# Altium PCB 最小系统.PcbDoc
Units mil, origin at the board's own origin, x right, y up, seen from the top; angles counter-clockwise.
Board outline 1775 x 1565 mil, 4 copper layers (Top Layer, GND02, PO, Bottom Layer), stack 23.756 mil thick; 50 components, 97 nets, 312 pads, 89 vias.
Unrouted connection lines stored in the file: 1.
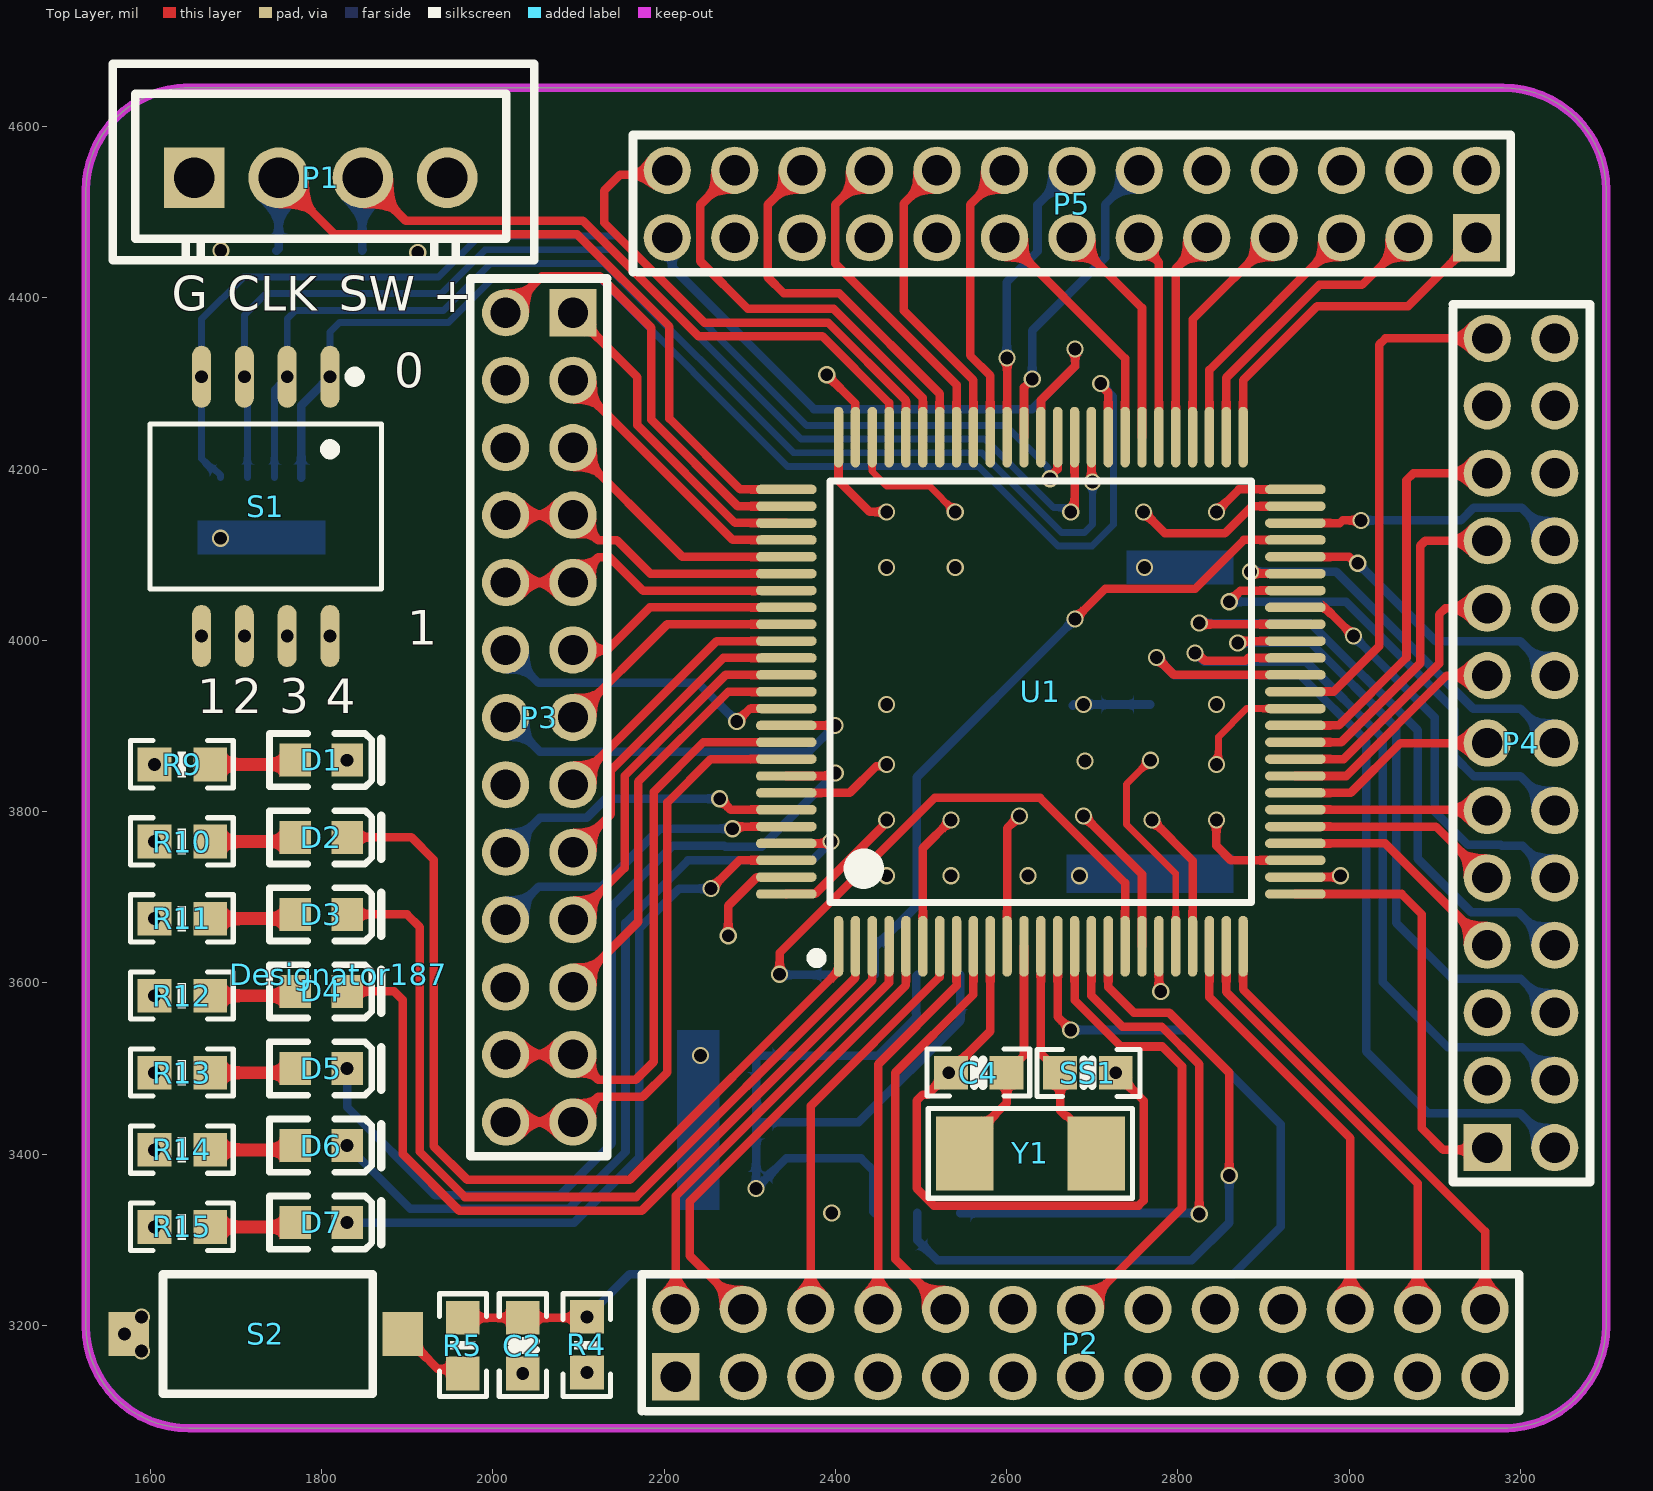
[diagram p0: Top Layer view]
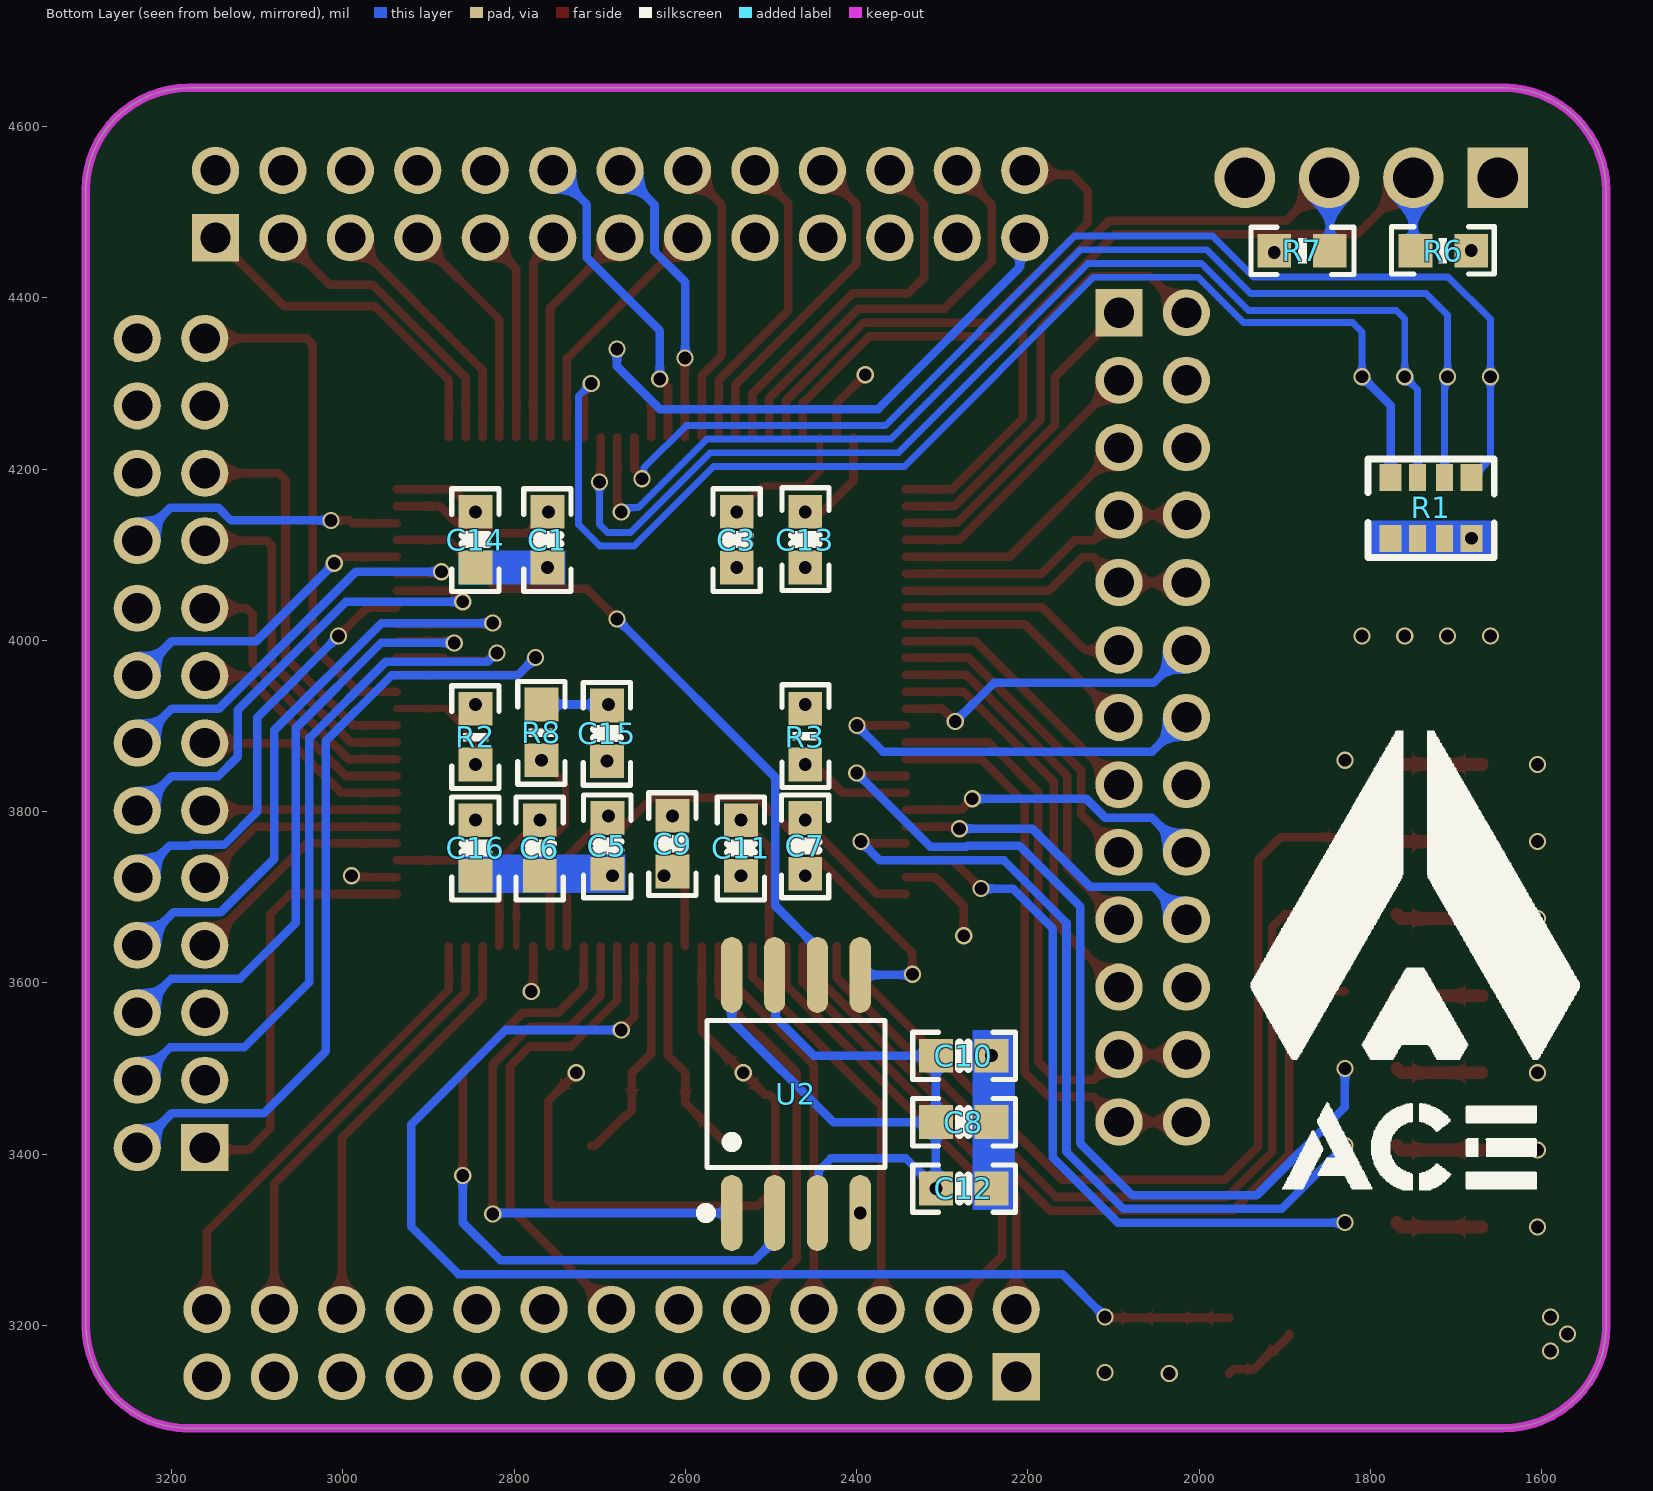
[diagram p1: Bottom Layer view, seen from below]
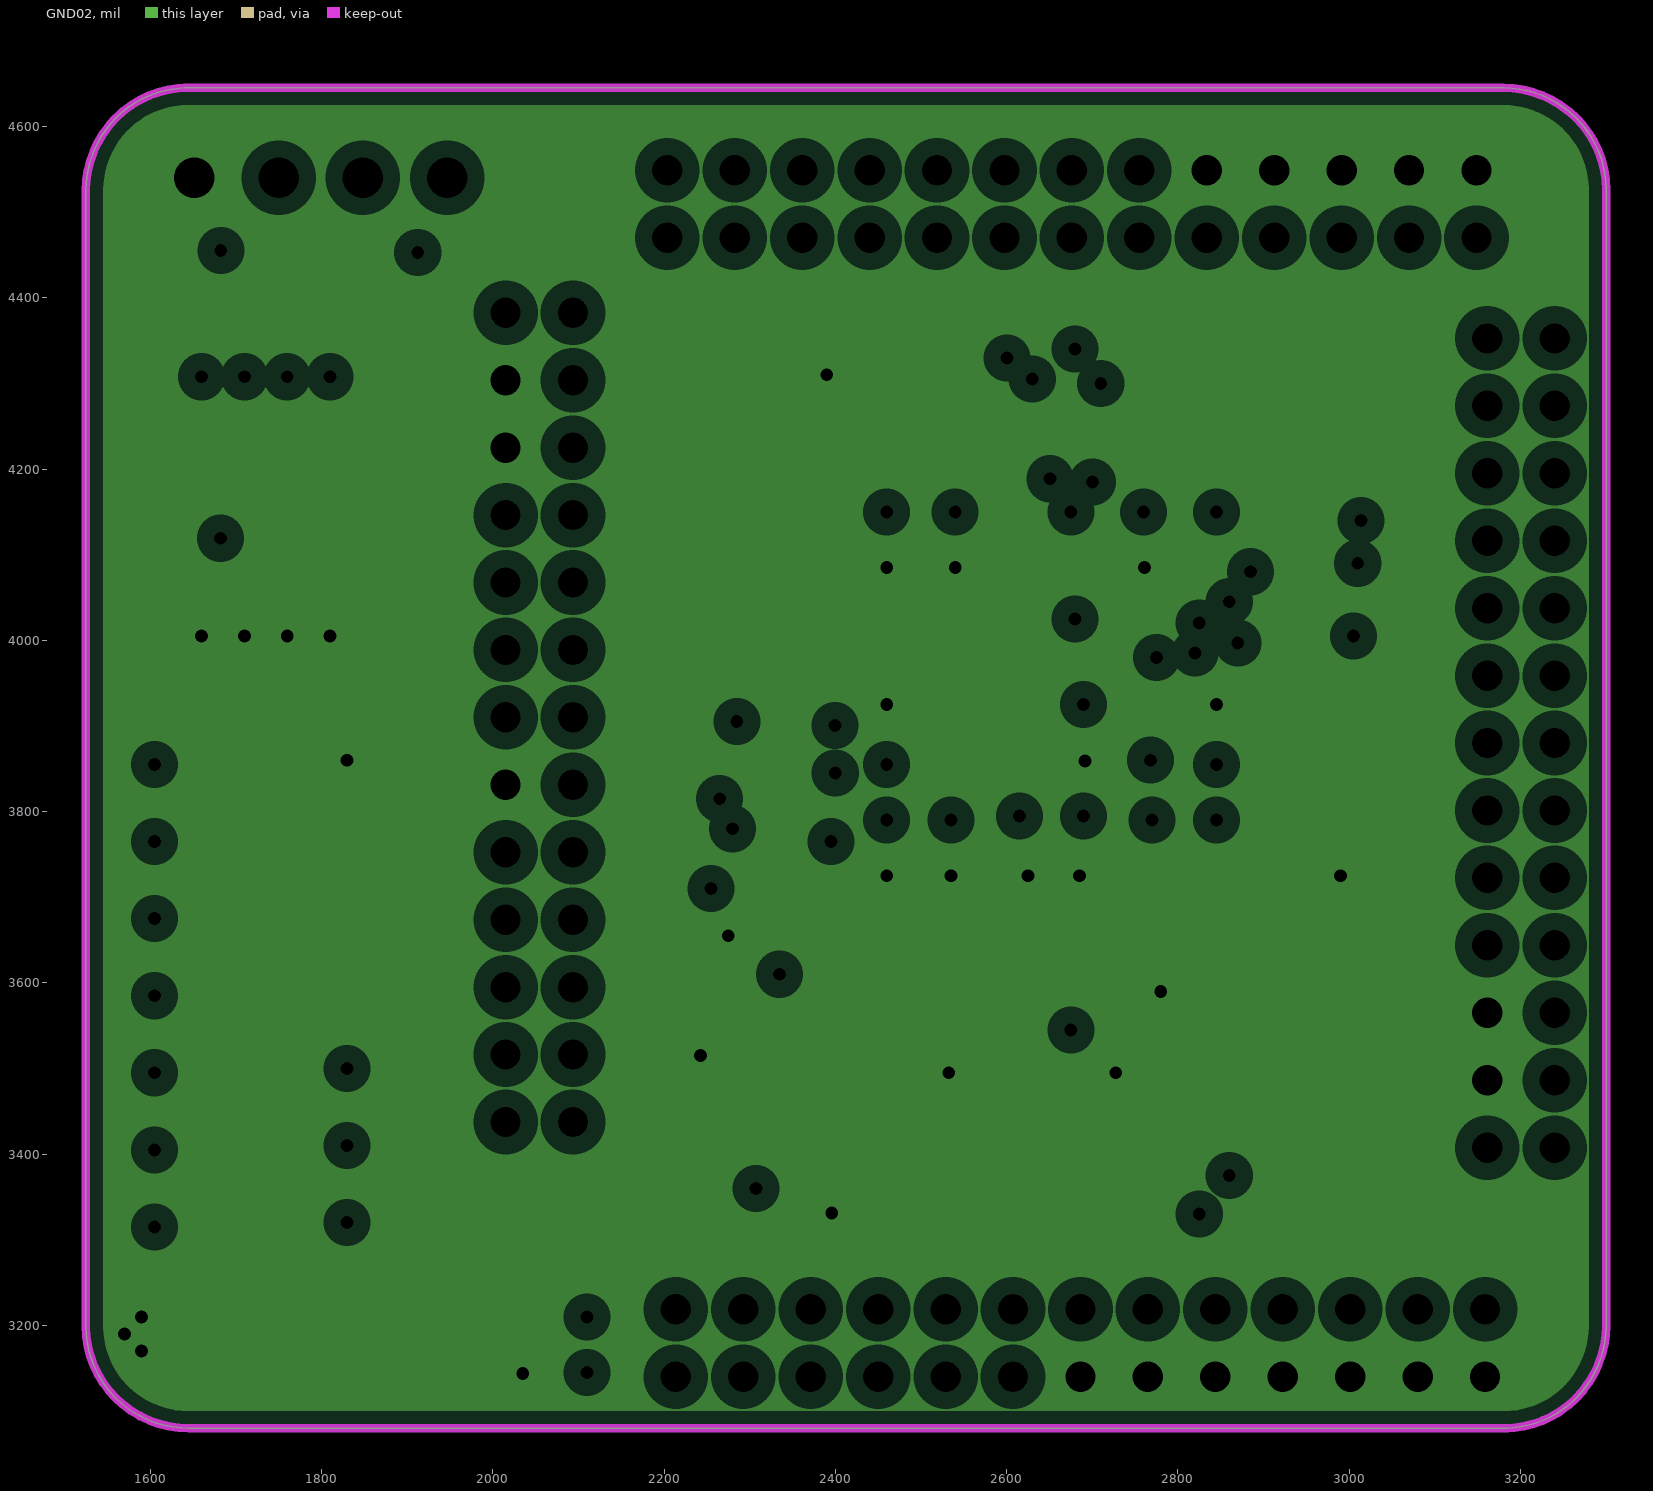
[diagram p2: GND02, clearances drawn from the general rule]
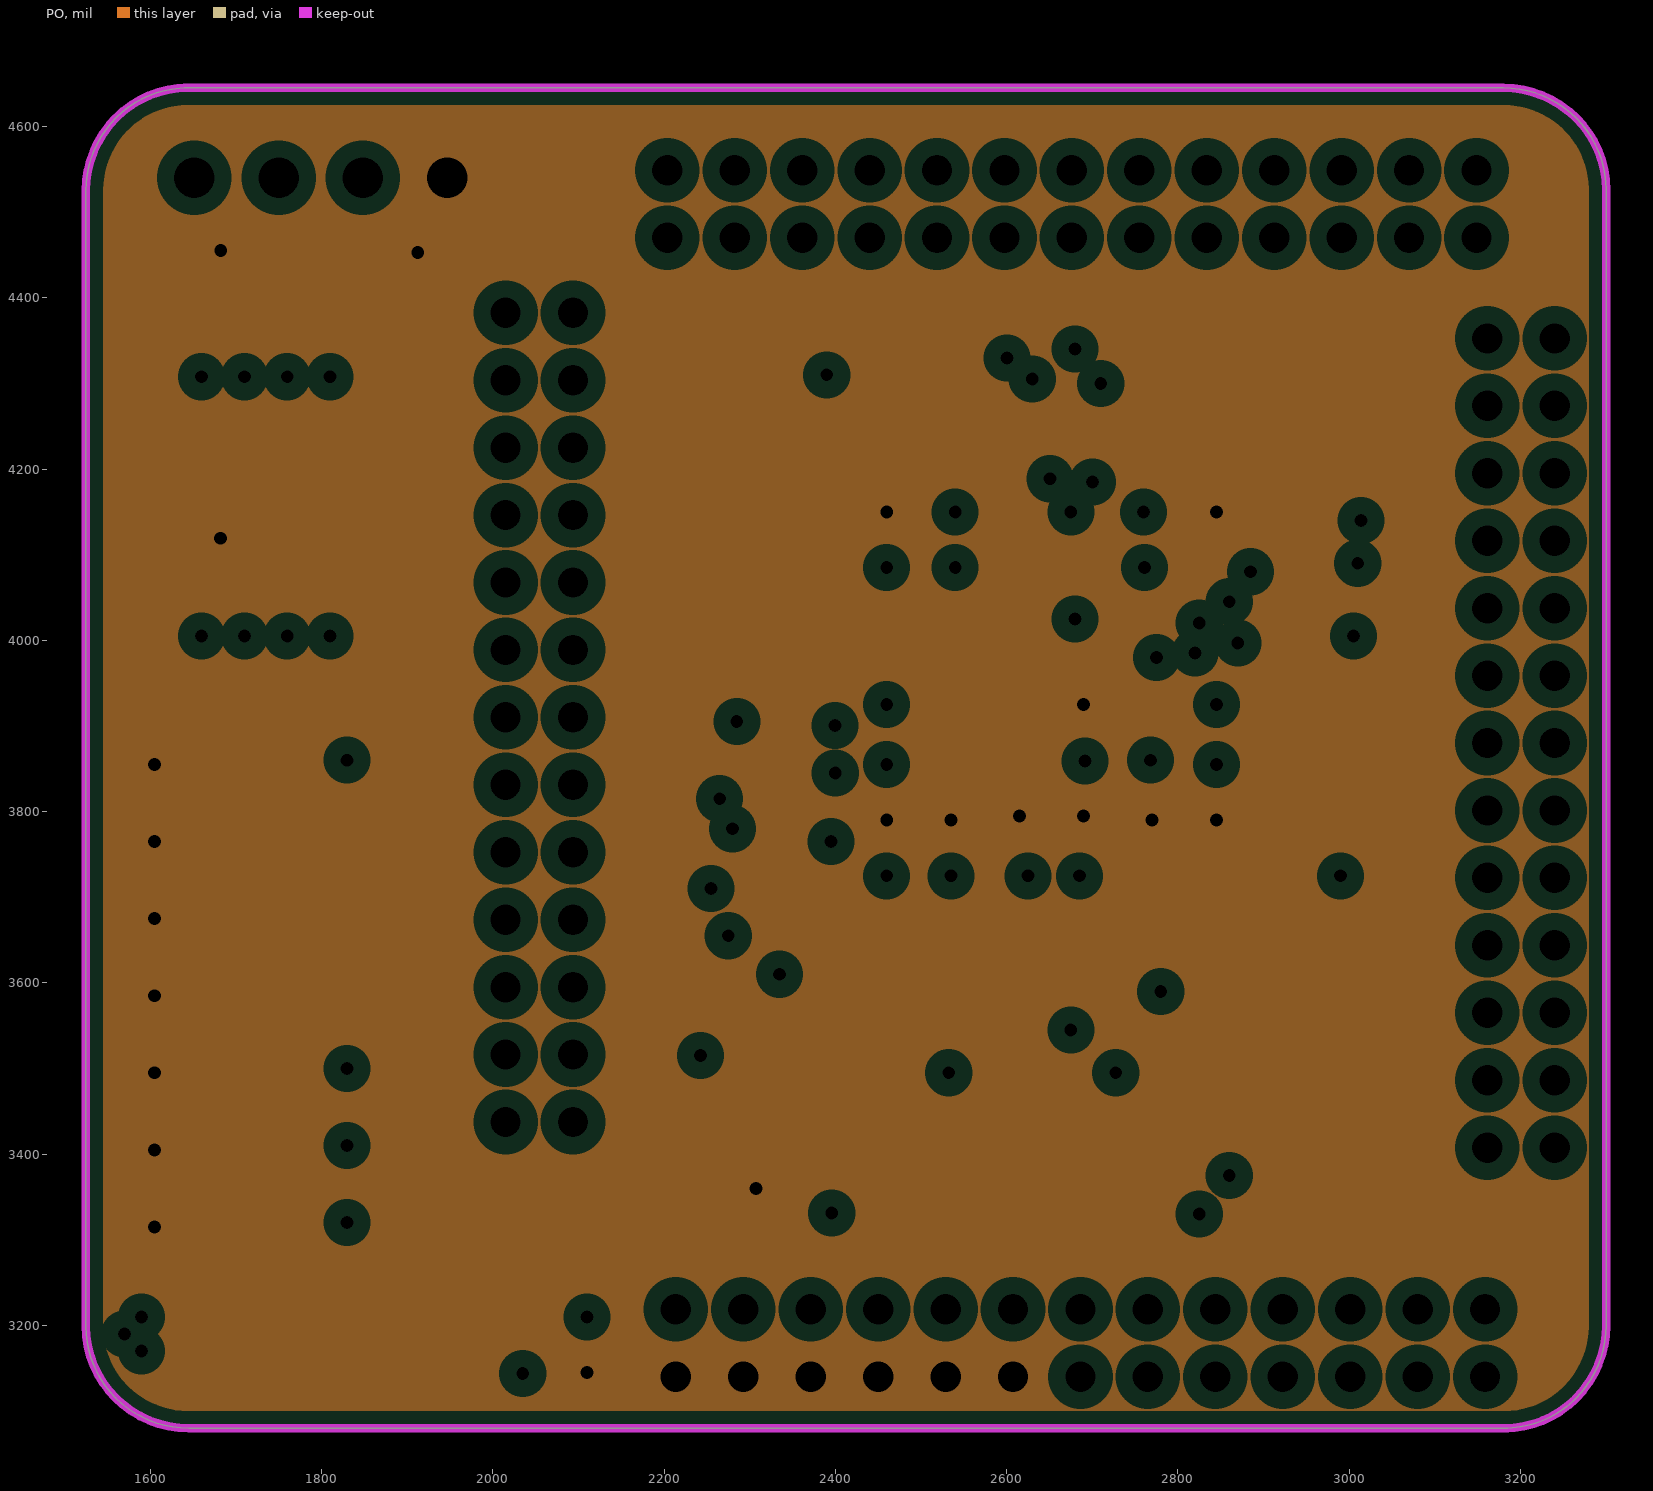
[diagram p3: PO, clearances drawn from the general rule]

## Layer stack, top to bottom
Top Solder: solder mask 0.4, Solder Resist, Dk 3.5
Top Layer: signal copper 1.4
Dielectric 2: prepreg 2.8, PP-006, Dk 4.1
GND02: plane copper 1.378, net GND
Dielectric 1: dielectric 12.6, FR-4, Dk 4.8
PO: plane copper 1.378, net 3.3V
Dielectric 3: prepreg 2.8, PP-006, Dk 4.1
Bottom Layer: signal copper 1.4
Bottom Solder: solder mask 0.4, Solder Resist, Dk 3.5

## Board outline
1525,3198.99 1525,4480 1525,4525 cw(c1645.71,4525) 1560.36,4610.36 cw(c1643.99,4526.72) 1643.99,4645 1640,4645 3180,4645 cw(c3180,4524.29) 3265.36,4609.64 cw(c3181.72,4526.01) 3300,4526.01 3300,4526 3300,3200 cw(c3179.29,3200) 3264.64,3114.64 cw(c3181.01,3198.28) 3181.01,3080 3185,3080 1645,3080 cw(c1645,3200.71) 1559.64,3115.36 cw(c1643.28,3198.99)

## Design rules (kind name [scope] priority, off if disabled: settings)
Clearance [All] p1: gap=6 ignorepadtopadclearanceinfootprint=FALSE
PlaneClearance [All] p1: clearance=20
PlaneConnect [All] p1: planeconnectstyle=Direct reliefexpansion=20 reliefentries=4 reliefconductorwidth=10 reliefairgap=10
PolygonConnect [All] p1: connectstyle=Direct reliefconductorwidth=10 reliefentries=4 polygonreliefangle="90 Angle" airgapwidth=10
RoomDefinition F44 [InComponentClass('F44')] p1: confinementstyle=ConfineIn formatcopy=TRUE lockcomponents=FALSE outline 0,0 2000,0 2000,1000 0,1000
RoutingVias [All] p1: holewidth=12 width=24 viastyle="Through Hole" minholewidth=10 minwidth=20 maxholewidth=15 maxwidth=30
SilkToSilkClearance [All] p1: silktosilkclearance=2
SolderMaskExpansion [All] p1: expansion=4 istentingtop=FALSE
Width [All] p1: maxlimit=100 minlimit=6 preferedwidth=10
27 further rules are at their usual default settings.

## Components (designator, comment, footprint, x,y, rotation, side; value= is the part's Value field where it differs from the comment)
C1 "2.2uF/0603/16V" "0603C  1   2" 2761,4107.5 r90 bottom
C2 "100nF/0603/50V" "0603C  1   2" 2035,3186.38 r270 top
C3 "2.2uF/0603/16V" "0603C  1   2" 2540,4107.5 r90 bottom
C4 "18pF/0603/50V" "0603C  1   2" 2557.5,3495 r0 top
C5 "100nF/0603/50V" "0603C  1   2" 2691,3750 r90 bottom
C6 "100nF/0603/50V" "0603C  1   2" 2770,3747.5 r90 bottom
C7 "100nF/0603/50V" "0603C  1   2" 2460,3750 r90 bottom
C8 "100nF/0603/50V" "0603C  1   2" 2265,3437.5 r0 bottom
C9 "100nF/0603/50V" "0603C  1   2" 2615,3752.5 r90 bottom
C10 "100nF/0603/50V" "0603C  1   2" 2265,3515 r0 bottom
C11 "100nF/0603/50V" "0603C  1   2" 2535,3747.5 r90 bottom
C12 "100nF/0603/50V" "0603C  1   2" 2265,3360 r0 bottom
C13 "100nF/0603/50V" "0603C  1   2" 2460,4127.5 r270 bottom
C14 "100nF/0603/50V" "0603C  1   2" 2845,4107.5 r90 bottom
C15 "100nF/0603/50V" "0603C  1   2" 2691.5,3881.38 r90 bottom
C16 "100nF/0603/50V" "0603C  1   2" 2845,3747.5 r90 bottom
D1 "红灯 0603" 0603_LED_S1 1799.69,3860 r180 top
D2 "绿灯 0603" 0603_LED_S1 1799.69,3770 r180 top
D3 "蓝灯 0603" 0603_LED_S1 1799.69,3680 r180 top
D4 "绿灯 0603" 0603_LED_S1 1799.69,3590 r180 top
D5 "蓝灯 0603" 0603_LED_S1 1799.69,3500 r180 top
D6 "绿灯 0603" 0603_LED_S1 1799.69,3410 r180 top
D7 "蓝灯 0603" 0603_LED_S1 1799.69,3320 r180 top
Designator187 "Comment" ACE 1820,3610 r0 top
P1 "SWD(XH2.54)" "XH2.54 4P -" 1799.15,4540 r0 top
P2 "排针排母" "排针 13*2 2mm" 2093.82,3270 r90 top
P3 "排针排母" "排针 13*2 2mm-4" 1878.74,4502.44 r0 top
P4 "排针排母" "排针 13*2 2mm-2 - duplicate" 3291.26,4472.48 r0 top
P5 "排针排母" "排针 13*2 2mm-3 - duplicate" 2078.82,4285 r90 top
R1 "排阻" 排阻_1206 1800.5,4214.14 r270 bottom
R2 "10K/0603/5%" 0603(偏大) 2845,3887.5 r90 bottom
R3 "10K/0603/5%" "0603R  1   2" 2470,3917.5 r270 bottom
R4 "10K/0603/5%" 0603(偏大) 2110,3177.5 r90 top
R5 "0R" 0603(偏大) 1965,3176.38 r270 top
R6 "1KR/1%/0603" 0603(偏大) 1715,4455 r180 bottom
R7 "1KR/1%/0603" 0603(偏大) 1880,4455 r0 bottom
R8 "0R" 0603(偏大) 2768,3892.5 r90 bottom
R9 "1K" 0603(偏大) 1637.5,3855 r0 top
R10 "1K" 0603(偏大) 1637.5,3765 r0 top
R11 "1K" 0603(偏大) 1637.5,3675 r0 top
R12 "1K" 0603(偏大) 1637.5,3585 r0 top
R13 "1K" 0603(偏大) 1637.5,3495 r0 top
R14 "1K" 0603(偏大) 1637.5,3405 r0 top
R15 "1K" 0603(偏大) 1637.5,3315 r0 top
S1 "4位拨码开关" 4位拨码开关 1603.28,4253.98 r270 top
S2 "SW-PB" 轻触开关 1565,3190 r180 top
SS1 "18pF/0603/50V" "0603C  1   2" 2705,3495 r180 top
U1 "STM32F407VET6" STM32F407VET6 2640,3940 r0 top
U2 "NOR FLASH" SOIC_8_280mil 2365,3385 r90 bottom
Y1 "12MHz" "25MHZ 2P 20PF" 2605,3365 r180 top

## Footprints (in the part's own frame and the unit in brackets; to place one, negate y for a bottom-side part, rotate by r counter-clockwise, add the part's x,y. Pads: shape width x height; smd on the part's side, far side on the other; paste and mask are expansions set on the pad)
4位拨码开关 [mm]
  oval 1.84x0.56 smd: 1(-1.366,5.251) 2(-1.366,3.981) 3(-1.366,2.711) 4(-1.366,1.441) 5(6.324,1.441) 6(6.324,2.711) 7(6.324,3.981) 8(6.324,5.251)
  silkscreen extent -1.52,-0.09 4.93,6.78, body extent -1.74,0 6.76,6.68, height 2.37
"25MHZ 2P 20PF" [mm]
  rect 1.7x2.2 smd: 1(-2.528,-0.91) 2(1.372,-0.91)
  silkscreen extent -3.61,-2.24 2.45,0.42
0603(偏大) [mm]
  rect 1x1 smd: 1(-0.826,0) 2(0.826,0)
  silkscreen extent -1.54,-0.69 1.51,0.71, body extent -0.8,-0.4 0.8,0.4, height 0.3
0603_LED_S1 [mm]
  rect 0.93x0.98 smd: A(0.77,0) K(-0.77,0)
  silkscreen extent -1.78,-0.79 1.54,0.79, body extent -0.8,-0.4 0.8,0.4, height 0.6
"0603C  1   2" [mm]
  rect 1x1 smd: 1(-0.572,0) 2(1.079,0)
  silkscreen extent -1.29,-0.69 1.77,0.71, body extent -0.55,-0.4 1.05,0.4, height 0.3
"0603R  1   2" [mil]
  rect 39.37x39.37 smd: 1(-2.5,10) 2(62.5,10)
  silkscreen extent -31,-17 90,38, body extent -1,-6 61,26, height 12
ACE [mil]
SOIC_8_280mil [mm]
  oval 2.25x0.63 smd: 1(-1.364,4.594) 2(-1.364,3.324) 3(-1.364,2.054) 4(-1.364,0.784) 5(5.696,0.784) 6(5.696,2.054) 7(5.696,3.324) 8(5.696,4.594)
  silkscreen extent -1.51,0.05 4.34,5.51, body extent -0.84,0.24 5.16,5.14, height 1.75
STM32F407VET6 [mm]
  oval 0.28x1.8 smd mask+0.051: 1(-6,-7.55) 2(-5.5,-7.55) 3(-5,-7.55) 4(-4.5,-7.55) 5(-4,-7.55) 6(-3.5,-7.55) 7(-3,-7.55) 8(-2.5,-7.55) 9(-2,-7.55) 10(-1.5,-7.55) 11(-1,-7.55) 12(-0.5,-7.55) 13(0,-7.55) 14(0.5,-7.55) 15(1,-7.55) 16(1.5,-7.55) 17(2,-7.55) 18(2.5,-7.55) 19(3,-7.55) 20(3.5,-7.55) 21(4,-7.55) 22(4.5,-7.55) 23(5,-7.55) 24(5.5,-7.55) 25(6,-7.55) 51(6,7.55) 52(5.5,7.55) 53(5,7.55) 54(4.5,7.55) 55(4,7.55) 56(3.5,7.55) 57(3,7.55) 58(2.5,7.55) 59(2,7.55) 60(1.5,7.55) 61(1,7.55) 62(0.5,7.55) 63(0,7.55) 64(-0.5,7.55) 65(-1,7.55) 66(-1.5,7.55) 67(-2,7.55) 68(-2.5,7.55) 69(-3,7.55) 70(-3.5,7.55) 71(-4,7.55) 72(-4.5,7.55) 73(-5,7.55) 74(-5.5,7.55) 75(-6,7.55)
  oval 1.8x0.28 smd mask+0.051: 26(7.55,-6) 27(7.55,-5.5) 28(7.55,-5) 29(7.55,-4.5) 30(7.55,-4) 31(7.55,-3.5) 32(7.55,-3) 33(7.55,-2.5) 34(7.55,-2) 35(7.55,-1.5) 36(7.55,-1) 37(7.55,-0.5) 38(7.55,0) 39(7.55,0.5) 40(7.55,1) 41(7.55,1.5) 42(7.55,2) 43(7.55,2.5) 44(7.55,3) 45(7.55,3.5) 46(7.55,4) 47(7.55,4.5) 48(7.55,5) 49(7.55,5.5) 50(7.55,6) 76(-7.55,6) 77(-7.55,5.5) 78(-7.55,5) 79(-7.55,4.5) 80(-7.55,4) 81(-7.55,3.5) 82(-7.55,3) 83(-7.55,2.5) 84(-7.55,2) 85(-7.55,1.5) 86(-7.55,1) 87(-7.55,0.5) 88(-7.55,0) 89(-7.55,-0.5) 90(-7.55,-1) 91(-7.55,-1.5) 92(-7.55,-2) 93(-7.55,-2.5) 94(-7.55,-3) 95(-7.55,-3.5) 96(-7.55,-4) 97(-7.55,-4.5) 98(-7.55,-5) 99(-7.55,-5.5) 100(-7.55,-6)
  silkscreen extent -6.8,-8.05 6.25,6.25, body extent -8,-8 8,8, height 1.6
"XH2.54 4P -" [mm]
  rect 1.8x1.8 hole 1.199: 1(-3.75,0)
  round 1.8 hole 1.199: 2(-1.248,0) 3(1.251,0) 4(3.75,0)
  silkscreen extent -6.17,-2.44 6.33,3.38, body extent -6.12,-2.39 6.38,3.41, height 7
"排针 13*2 2mm" [mm] "1-25"
  rect 1.4x1.4 hole 0.9: 1(-3.302,-3.048)
  round 1.4 hole 0.9: 2(-3.302,-5.048) 3(-3.302,-7.048) 4(-3.302,-9.048) 5(-3.302,-11.048) 6(-3.302,-13.048) 7(-3.302,-15.048) 8(-3.302,-17.048) 9(-3.302,-19.048) 10(-3.302,-21.048) 11(-3.302,-23.048) 12(-3.302,-25.048) 13(-3.302,-27.048) 14(-1.302,-27.048) 15(-1.302,-25.048) 16(-1.302,-23.048) 17(-1.302,-21.048) 18(-1.302,-19.048) 19(-1.302,-17.048) 20(-1.302,-15.048) 21(-1.302,-13.048) 22(-1.302,-11.048) 23(-1.302,-9.048) 24(-1.302,-7.048) 25(-1.302,-5.048) 26(-1.302,-3.048)
  silkscreen extent -4.32,-28.07 -0.25,-2.03, body extent -4.83,-27.62 0.25,-1.78, height 8.54
"排针 13*2 2mm-2 - duplicate" [mm] "26-50"
  rect 1.4x1.4 hole 0.9: 1(-3.302,-27.048)
  round 1.4 hole 0.9: 2(-3.302,-25.048) 3(-3.302,-23.048) 4(-3.302,-21.048) 5(-3.302,-19.048) 6(-3.302,-17.048) 7(-3.302,-15.048) 8(-3.302,-13.048) 9(-3.302,-11.048) 10(-3.302,-9.048) 11(-3.302,-7.048) 12(-3.302,-5.048) 13(-3.302,-3.048) 14(-1.302,-27.048) 15(-1.302,-25.048) 16(-1.302,-23.048) 17(-1.302,-21.048) 18(-1.302,-19.048) 19(-1.302,-17.048) 20(-1.302,-15.048) 21(-1.302,-13.048) 22(-1.302,-11.048) 23(-1.302,-9.048) 24(-1.302,-7.048) 25(-1.302,-5.048) 26(-1.302,-3.048)
  silkscreen extent -4.32,-28.07 -0.25,-2.03, body extent -4.83,-27.5 0.25,-1.65, height 8.54
"排针 13*2 2mm-3 - duplicate" [mm] "51-75"
  rect 1.4x1.4 hole 0.9: 1(4.699,-27.175)
  round 1.4 hole 0.9: 2(4.699,-25.175) 3(4.699,-23.175) 4(4.699,-21.175) 5(4.699,-19.175) 6(4.699,-17.175) 7(4.699,-15.175) 8(4.699,-13.175) 9(4.699,-11.175) 10(4.699,-9.175) 11(4.699,-7.175) 12(4.699,-5.175) 13(4.699,-3.175) 14(6.699,-17.175) 15(6.699,-15.175) 16(6.699,-13.175) 17(6.699,-11.175) 18(6.699,-9.175) 19(6.699,-7.175) 20(6.699,-5.175) 21(6.699,-3.175) 22(6.699,-27.175) 23(6.699,-25.175) 24(6.699,-23.175) 25(6.699,-21.175) 26(6.699,-19.175)
  silkscreen extent 3.68,-28.19 7.75,-2.16, body extent 3.56,-27.75 8.64,-1.9, height 8.54
"排针 13*2 2mm-4" [mm] "75-100"
  rect 1.4x1.4 hole 0.9: 1(5.461,-3.048)
  round 1.4 hole 0.9: 2(5.461,-5.048) 3(5.461,-7.048) 4(5.461,-9.048) 5(5.461,-11.048) 6(5.461,-13.048) 7(5.461,-15.048) 8(5.461,-17.048) 9(5.461,-19.048) 10(5.461,-21.048) 11(5.461,-23.048) 12(5.461,-25.048) 13(5.461,-27.048) 14(3.461,-27.048) 15(3.461,-25.048) 16(3.461,-23.048) 17(3.461,-21.048) 18(3.461,-19.048) 19(3.461,-17.048) 20(3.461,-15.048) 21(3.461,-13.048) 22(3.461,-11.048) 23(3.461,-9.048) 24(3.461,-7.048) 25(3.461,-5.048) 26(3.461,-3.048)
  silkscreen extent 2.41,-28.07 6.48,-2.03, body extent 1.91,-27.62 6.99,-1.78, height 8.54
排阻_1206 [mm]
  rect 0.8x0.65 smd: 1(0.613,3.01) 4(0.613,0.61) 5(2.413,0.61) 8(2.413,3.01)
  rect 0.8x0.5 smd: 2(0.613,2.21) 3(0.613,1.41) 6(2.413,1.41) 7(2.413,2.21)
  silkscreen extent 0.06,-0.06 2.98,3.68
轻触开关 [mm]
  rect 1.2x1.3 smd: 1(-0.254,0) 2(-8.382,0)
  silkscreen extent -7.49,-1.78 -1.27,1.78, body extent -8.44,-1.8 -0.44,1.8, height 2.4

## Part data
C1 C2 C3 C4 C5 C6 C7 C8 C9 C10 C11 C12 C13 C14 C15 C16 SS1: library part C
D1: library part "0603 红灯", "发光二极管", Package=0603, SuppliersPartNumber=C2286, ComponentLink1Description=供应商链接, ComponentLink1URL=http://www.szlcsc.com/product/details_2659.html, Supplier=LC
D2 D4 D6: library part "0603 绿灯", "发光二极管", Package=0603, SuppliersPartNumber=C72043, ComponentLink1Description=供应商链接, ComponentLink1URL=http://www.szlcsc.com/product/details_73152.html, Supplier=LC
D3 D5 D7: library part "0603 蓝灯", "发光二极管", Package=0603, SuppliersPartNumber=C72041, ComponentLink1Description=供应商链接, ComponentLink1URL=http://www.szlcsc.com/product/details_73150.html, Supplier=LC
P1: library part "Header 4", "Header, 4-Pin", LatestRevisionDate=17-Jul-2002, LatestRevisionNote="Re-released for DXP Platform.", Publisher="Altium Limited"
P2 P3 P4 P5: library part 13*2排针
R2 R3 R4 R5 R6 R7 R8 R9 R10 R11 R12 R13 R14 R15: library part R
S2: "Switch", LatestRevisionDate=17-Jul-2002, LatestRevisionNote="Re-released for DXP Platform.", PackageDescription="Switch; 2 Leads", PackageReference=SPST-2, Published=24-Mar-1999, Publisher="Altium Limited"
U1: "ARM", Package=LQFP-100_14x14x05P, SuppliersPartNumber=C28730, ComponentLink1Description=供应商链接, ComponentLink1URL=http://www.szlcsc.com/product/details_29482.html, Supplier=LC
Y1: library part 晶振, LatestRevisionDate=17-Jul-2002, LatestRevisionNote="Re-released for DXP Platform.", PackageDescription="Crystal, Thru-Hole; 2 Leads; Body 3.1 x 8.2 mm (Dia.xH)", PackageReference=R38, Published=8-Jun-2000, Publisher="Altium Limited"

## Via types
v1: diameter 20, hole 15, Top Layer to Bottom Layer, tented both sides, 89 vias

## Nets (pads, with @x,y where several pads share a name; then routed paths per layer and width w, separated by ;. In a path a pad name is that pad's centre, name@x,y a point inside that pad or via, vN(x,y) a via of type N, cw(c..) or ccw(c..) an arc to the next point about the centre after c; other vN are vias at no path point)
3.3V: C5.2 C6.2 C7.2 C8.2 C9.2 C10.2 C11.2 C12.2 C13.1 C14.2 C15.2 C16.2 P1.4 P2.1 P2.2 P2.3 P2.4 P2.5 P2.6 R1.5 R1.6 R1.7 R1.8 R4.1 R6.2 R7.2 R8.2 R9.1 R10.1 R11.1 R12.1 R13.1 R14.1 R15.1 U1.6 U1.11 U1.19 U1.22 U1.28 U1.50 U1.75 U1.100 U2.3 U2.7 U2.8 | length 2213.7
  Top Layer w10: U1.100 2342.95,3703.98 2376.54,3703.98 2460,3787.44 v1(2460,3790) ; U1.75 2403.78,4186.22 2440,4150 v1(2460,4150) ; U1.6 2502.2,3757.2 v1(2535,3790) ; U1.11 2600.63,3780.63 v1(2615,3795) ; v1(2690,3795) 2758.11,3726.89 U1.19 ; v1(2770,3790) 2817.17,3742.83 U1.22 ; v1(2845,3790) 2845,3760 2861.85,3743.15 U1.28 ; v1(2845,4150) 2871.22,4176.22 U1.50
  Bottom Layer w10: U2.3 2444.48,3332.69 2444.48,3380.54 2440.02,3385 2430,3395 2342.5,3395 v1(2307.5,3360) C8.2 ; U2.7 2494.74,3608.1 2494.74,3559.74 2450,3515 C10.2 C8.2 ; U2.8 2545.88,3555.88 2427.5,3437.5 C8.2 ; C15.2@2677.5,3923.88 C15.2@2678.62,3925 ; v1(2690,3925) R8.2
  other v1: 2110,3145 1605,3315 1605,3405 1605,3495 1605,3585 1605,3675 1605,3765 1605,3855 1682.01,4119.13 1912.5,4453 1682.5,4455
CAN1_RX(PD0): P3.4 P3.23 U1.81 | length 356.1
  Top Layer w10: P3.23 P3.4 2123.11,4116.85 2145,4116.85 2183.9,4077.95 2276.3,4077.95 2276.46,4077.8 U1.81
CAN1_TX(PD1): P3.5 P3.22 U1.82 | length 356.2
  Top Layer w10: P3.22 P3.5 2123.11,4096.85 2136.72,4096.85 2175.61,4057.95 2268.01,4057.95 2268.17,4057.8 2342.44,4057.8 U1.82
CAN2_RX(PB5): P3.12 P3.15 U1.91 | length 687.8
  Top Layer w10: P3.15 P3.12 2123.11,3486.93 2166.93,3486.93 2188,3508 2188,3823 2246.1,3881.1 2302.79,3881.1 2302.95,3880.94 U1.91
CAN2_TX(PB6): P3.13 P3.14 U1.92 | length 687.8
  Top Layer w10: P3.14 P3.13 2123.11,3466.93 2175.21,3466.93 2204,3495.72 2204,3810.72 2254.39,3861.1 2342.6,3861.1 U1.92
CS_PC1: U1.16 U2.1 | length 671.5
  Top Layer w10: U1.16 2699.06,3584.94 2735,3549 2781,3549 2825,3505 v1(2825,3330)
  Bottom Layer w10: U2.1 2823.71,3331.29 v1(2825,3330)
GND: C1.1 C2.2 C3.1 C4.1 C5.1 C6.1 C7.1 C8.1 C9.1 C10.1 C11.1 C12.1 C13.2 C14.1 C15.1 C16.1 D1.K P1.1 P2.7 P2.8 P2.9 P2.10 P2.11 P2.12 P2.13 P3.19 P3.24 P3.25 P4.2 P4.3 P5.22 P5.23 P5.24 P5.25 P5.26 R2.2 R3.1 S1.5 S1.6 S1.7 S1.8 S2.1 SS1.1 U1.10 U1.20 U1.27 U1.74 U1.99 U2.4 | length 1069.9
  Top Layer w10: v1(2275,3655) 2275,3690 2308.27,3723.27 2342.56,3723.27 U1.99 ; v1(2390,4310) 2423.46,4276.54 U1.74 ; U1.10 2580.94,3543.44 2507.07,3469.57 2502.07,3469.57 2495,3462.5 2495,3360 2515,3340 2754.14,3340 2760,3345.86 2760,3462.5 v1(2727.5,3495) ; U1.20 2777.8,3594.91 2780,3592.71 v1(2780,3590) ; U1.27 2988.46,3723.46 v1(2990,3725)
  other v1: 2035,3143.88 1590,3170 1570,3190 1590,3210 2395.88,3331.29 2532.5,3495 2242.5,3515 2460,3725 2535,3725 2625,3725 2685,3725 2691.5,3858.88 1830,3860 2460,3925 2845,3925 1660,4005 1710,4005 1760,4005 1810,4005 2460,4085 2540,4085 2761,4085
LED_BLUE(PB7): D5.K U1.93 | length 1083.3
  Top Layer w10: U1.93 2393.87,3841.57 2397.29,3845 v1(2400,3845)
  Bottom Layer w10: v1(1830,3500) 1830,3455 1933,3352 2078.51,3352 2139,3412.49 2139,3689 2210,3760 2270.3,3760 2271.3,3759 2314,3759 v1(2400,3845)
LED_BLUE(PE1): D7.K U1.98 | length 844.7
  Top Layer w10: v1(2255,3710) 2288.15,3743.15 U1.98
  Bottom Layer w10: v1(1830,3320) 2095,3320 2171,3396 2171,3663.37 2217.63,3710 v1(2255,3710)
LED_BLUE(PE3): D3.K U1.2 | length 1026.6
  Top Layer w10: D3.K 1900,3680 1915,3665 1915,3402.63 1967.63,3350 2167.37,3350 2423.27,3605.9 2423.27,3642.56 U1.2
LED_GREEN(PE0): D6.K U1.97 | length 983.1
  Top Layer w10: U1.97 2390.13,3762.83 2392.29,3765 v1(2395,3765)
  Bottom Layer w10: v1(1830,3410) 1904,3336 2088.37,3336 2155,3402.63 2155,3670 2228,3743 2373,3743 v1(2395,3765)
LED_GREEN(PE2): D2.K U1.1 | length 1065.9
  Top Layer w10: D2.K 1905,3770 1931,3744 1931,3409.25 1970.25,3370 2160,3370 2402.64,3612.64 2403.31,3612.64 2403.78,3613.11 U1.1
LED_GREEN(PE4): D4.K U1.3 | length 975.7
  Top Layer w10: D4.K 1885,3590 1895,3580 1895,3400 1961,3334 2174,3334 2443.15,3603.15 U1.3
NetC1_2: C1.2 U1.49 | length 200.7
  Top Layer w10: v1(2760,4150) 2785,4125 2855,4125 2886.54,4156.54 U1.49
NetC2_1: C2.1 R4.2 R5.1 U1.14 | length 1513.6
  Top Layer w10: R5.1 2108.88,3208.88 v1(2110,3210) ; U1.14 2659.68,3560.32 v1(2675,3545)
  Bottom Layer w10: v1(2110,3210) 2160,3260 2865,3260 2920,3315 2920,3435 2810,3545 v1(2675,3545)
NetC3_2: C3.2 U1.73 | length 156.7
  Top Layer w8: U1.73 2443.15,4196.85 2460,4180 2510,4180 v1(2540,4150)
NetD1_A: D1.A R9.2 | length 101.4
  Top Layer w15: R9.2 1764.37,3855 D1.A
NetD2_A: D2.A R10.2 | length 101.4
  Top Layer w15: R10.2 1764.37,3765 D2.A
NetD3_A: D3.A R11.2 | length 101.4
  Top Layer w15: R11.2 1764.37,3675 D3.A
NetD4_A: D4.A R12.2 | length 101.4
  Top Layer w15: R12.2 1764.37,3585 D4.A
NetD5_A: D5.A R13.2 | length 101.4
  Top Layer w15: R13.2 1764.37,3495 D5.A
NetD6_A: D6.A R14.2 | length 101.4
  Top Layer w15: R14.2 1764.37,3405 D6.A
NetD7_A: D7.A R15.2 | length 101.4
  Top Layer w15: R15.2 1764.37,3315 D7.A
NetR3_2: R3.2 U1.94 | length 131
  Top Layer w10: U1.94 2416.89,3821.89 2448.09,3853.09 2458.09,3853.09 v1(2460,3855)
NetR5_2: R5.2 S2.2 | length 90.3
  Top Layer w10: S2.2 1895,3188.03 1913.62,3169.41 1915.59,3169.41 1936.17,3148.83 1960.05,3148.83 R5.2
NetR8_1: R8.1 U1.21 | length 252.7
  Top Layer w8: v1(2768,3860) 2740,3832 2740,3785 2797.48,3727.52 U1.21
OSC1: SS1.2 U1.13 Y1.1 | length 265.6
  Top Layer w10: U1.13 2640,3517.5 SS1.2 2662.5,3450.86 2668.36,3445 2670.21,3445 2676.07,3439.14 2705.21,3410 Y1.1@2710,3410
OSC2: C4.2 U1.12 Y1.2 | length 253.1
  Top Layer w10: Y1.2@2556.46,3416.14 2600,3459.68 C4.2 2620.32,3515.32 U1.12
PA0: P2.16 U1.23 | length 492.1
  Top Layer w10: U1.23 2836.85,3583.15 3001.22,3418.78 P2.16
PA1: P2.15 U1.24 | length 516.6
  Top Layer w10: U1.24 2856.54,3589.38 3079.96,3365.96 P2.15
PA4: P4.4 U1.29 | length 273.3
  Top Layer w10: U1.29 3042.24,3762.83 P4.4
PA5: P4.5 U1.30 | length 248.9
  Top Layer w10: U1.30 3101.3,3782.52 P4.5
PA8: P5.17 U1.67 | length 361.2
  Top Layer w10: P5.17 2480,4509.96 2480,4385 2561.26,4303.74 U1.67
PA9: P5.18 U1.68 | length 386.7
  Top Layer w10: P5.18 2400,4508.7 2400,4440 2541.57,4298.43 U1.68
PA11: P5.20 U1.70 | length 494.5
  Top Layer w10: P5.20 2242.38,4508.56 2242.38,4442.62 2298,4387 2398.25,4387 2502.2,4283.05 U1.70
PA12: P5.21 U1.71 | length 602.2
  Top Layer w10: P5.21 2198.76,4543.69 2148.69,4543.69 2130,4525 2130,4487.88 2246.88,4371 2391.63,4371 2482.32,4280.3 2482.32,4237.44 U1.71
PA15: P3.26 U1.77 | length 519.4
  Top Layer w10: P3.26 2057.56,4425 2125,4425 2185,4365 2185,4257.7 2286.16,4156.54 U1.77
PB0: P4.10 U1.35 | length 401.8
  Top Layer w10: U1.35 2990.69,3880.94 3083,3973.25 3083,4110.4 3088.86,4116.26 P4.10
PB1: P4.11 U1.36 | length 467.3
  Top Layer w10: U1.36 2987.75,3900.63 3067,3979.88 3067,4187 3075,4195 P4.11
PB2: R2.1 U1.37 | length 136.9
  Top Layer w8: v1(2845,3855) 2847.3,3857.3 2847.3,3887.3 2880.32,3920.32 U1.37
PB3: P3.21 U1.89 | length 368.8
  Top Layer w10: v1(2285,3905) 2300.32,3920.32 U1.89
  Bottom Layer w10: P3.21 2053.56,3950.18 2239.82,3950.18 v1(2285,3905)
PB4: P3.20 U1.90 | length 471.3
  Top Layer w10: U1.90 2399.37,3900.63 v1@2400,3900
  Bottom Layer w10: P3.20 2055,3870 2369.37,3870 v1(2399.69,3900.32)
PB8: P3.18 U1.95 | length 358.9
  Top Layer w10: v1(2265,3815) 2277.8,3802.2 U1.95
  Bottom Layer w10: P3.18 2055.18,3792.7 2109.71,3792.7 2132.01,3815 v1(2265,3815)
PB9: P3.17 U1.96 | length 372.8
  Top Layer w10: v1(2280,3780) 2282.71,3780 2285.23,3782.52 U1.96
  Bottom Layer w10: P3.17 2053.56,3712.34 2109.71,3712.34 2127.34,3712.34 2195,3780 v1(2280,3780)
PB11: P4.23 U1.48 | length 326.2
  Top Layer w10: U1.48 2989.14,4136.85 2992.29,4140 v1(3014,4140)
  Bottom Layer w10: v1(3014,4140) 3130.47,4140 3145.29,4154.82 3201.44,4154.82 P4.23
PB12: P5.1 U1.51 | length 407.8
  Top Layer w10: U1.51 2876.22,4303.59 2962.63,4390 3068.7,4390 P5.1
PB13: P5.2 U1.52 | length 350.4
  Top Layer w10: U1.52 2856.54,4306.54 2965,4415 3014.96,4415 P5.2
PB14: P5.3 U1.53 | length 296.7
  Top Layer w10: U1.53 2836.85,4315.63 P5.3
PB15: P5.4 U1.54 | length 272.2
  Top Layer w10: U1.54 2817.17,4374.69 P5.4
PC0: P2.20 U1.15 | length 553.2
  Top Layer w10: U1.15 2679.37,3580 2733.68,3525.69 2781.69,3525.69 2804.85,3502.52 2804.85,3337.33 P2.20
PC4: P4.8 U1.33 | length 272.6
  Top Layer w10: U1.33 2996.57,3841.57 3113.78,3958.78 P4.8
PC5: P4.9 U1.34 | length 330.6
  Top Layer w10: U1.34 2993.63,3861.26 3105,3972.63 3105,4030 3112.52,4037.52 P4.9
PC8: P5.15 U1.65 | length 343.5
  Top Layer w10: v1@2600,4330 2600.63,4329.37 U1.65
  Bottom Layer w10: v1(2600.32,4329.69) 2600.32,4418.26 2636.08,4454.03 2636.08,4508.56 P5.15
PC9: P5.16 U1.66 | length 337.9
  Top Layer w10: U1.66 2580.94,4309.06 2557.34,4332.66 2557.34,4508.56 P5.16
PC12: P3.3 U1.80 | length 301.8
  Top Layer w10: P3.3 2221.22,4097.48 U1.80
PC13: P2.24 U1.7 | length 486.4
  Top Layer w10: P2.24 2371.3,3456.3 2521.69,3606.69 2521.69,3642.56 U1.7
PC14: P2.23 U1.8 | length 461.9
  Top Layer w10: P2.23 2450.04,3505.04 2541.57,3596.57 U1.8
PC15: P2.22 U1.9 | length 486.2
  Top Layer w10: P2.22 2470,3277.52 2470,3495 2561.26,3586.26 U1.9
PD2: P3.6 U1.83 | length 269.6
  Top Layer w10: P3.6 2133.74,3988.74 2183.43,4038.43 U1.83
PD3: P3.7 U1.84 | length 294.1
  Top Layer w10: P3.7 2095,3910 2203.74,4018.74 U1.84
PD4: P3.8 U1.85 | length 318.5
  Top Layer w10: P3.8 2261.54,3999.06 U1.85
PD7: P3.11 U1.88 | length 487.8
  Top Layer w10: P3.11 2170,3671.3 2170,3835 2274.8,3939.8 2342.56,3939.8 U1.88
PD10: P5.7 U1.57 | length 266.7
  Top Layer w10: P5.7 2758.11,4388.15 U1.57
PD11: P5.8 U1.58 | length 291.1
  Top Layer w10: P5.8 2738.43,4329.09 U1.58
PD12: R1.4 S1.1 U1.59 | length 1503.4
  Top Layer w10: v1(2710,4300) 2710,4297.88 2718.74,4289.14 U1.59
  Bottom Layer w8: v1(1810,4307.76) 1810,4360 1821,4371 1948.48,4371 2001.48,4424 2123.37,4424 2344.37,4203 2567,4203 2660,4110 2700,4110 2725,4135 2725,4285 v1(2710,4300)
  Bottom Layer w10: R1.4 1776.49,4274.25 v1(1810,4307.76)
PD13: R1.3 S1.2 U1.60 | length 1395.8
  Top Layer w6: U1.60 U1.60@2699.71,4236.59
  Top Layer w10: U1.60 2699.06,4186.31 v1(2700.37,4185)
  Bottom Layer w8: R1.3 1745,4292.76 v1(1760,4307.76) 1760,4375 1770,4385 1942.68,4385 1997.68,4440 2130,4440 2351,4219 2571,4219 2664,4126 2691,4126 2700.37,4135.37 v1(2700.37,4185)
PD14: R1.2 S1.3 U1.61 | length 1394.8
  Top Layer w10: v1@2679.37,4157.08 U1.61
  Bottom Layer w8: R1.2 1713.5,4301.55 1710,4305.05 v1(1710,4307.76) 1710,4380 1735,4405 1940.05,4405 1991.05,4456 2139,4456 2360,4235 2575,4235 2655,4155 2666.75,4155 2671.75,4150 v1(2675,4150)
PD15: R1.1 S1.4 U1.62 | length 1402.6
  Top Layer w10: v1(2650.75,4188.69) 2650.75,4191.13 2659.49,4199.87 2659.49,4237.05 U1.62
  Bottom Layer w8: R1.1 1682.01,4192.95 1674.21,4200.74 1671.26,4200.74 1660,4212.01 v1(1660,4307.76) 1660,4375 1709.31,4424.31 1936.74,4424.31 1984.43,4472 2145.63,4472 2366.63,4251 2599,4251 2648.47,4201.53 2648.47,4190.97 v1(2650.75,4188.69)
PE5: P2.26 U1.4 | length 527.2
  Top Layer w10: P2.26 2213.82,3351.19 2462.83,3600.21 U1.4
PE6: P2.25 U1.5 | length 554.5
  Top Layer w10: P2.25 2230,3281.3 2230,3344.75 2482.52,3597.26 U1.5
PE7: P4.13 U1.38 | length 601
  Top Layer w10: U1.38 2981.86,3940 3035,3993.14 3035,4345 3042.48,4352.48 P4.13
PE8: P4.14 U1.39 | length 1085
  Top Layer w10: v1(2775,3980) 2795.31,3959.68 U1.39
  Bottom Layer w10: v1(2775,3980) 2796,3959 2943.37,3959 3020,3882.37 3020,3520 3092.22,3447.78 3199.82,3447.78 P4.14
PE9: P4.15 U1.40 | length 915.9
  Top Layer w10: v1(2820,3985) 2822.71,3985 2831.71,3976 2878.7,3976 2882.07,3979.37 U1.40
  Bottom Layer w10: v1(2820,3985) 2820.86,3985 2830.86,3975 2950,3975 3039,3886 3039,3601 3115,3525 3201.34,3525 P4.15
PE10: P4.16 U1.41 | length 750.2
  Top Layer w10: v1(2870,3997) 2872.71,3997 2874.76,3999.06 U1.41
  Bottom Layer w10: v1(2870,3997) 2955.37,3997 3055,3897.37 3055,3670 3120,3605 3200.08,3605 P4.16
PE11: P4.17 U1.42 | length 771.5
  Top Layer w10: v1(2825,4020) 2826.26,4018.74 U1.42
  Bottom Layer w10: v1(2825,4020) 2955,4020 3080,3895 3080,3745 3142.62,3682.38 3197.62,3682.38 3236.18,3643.82 P4.17
PE12: P4.18 U1.43 | length 498
  Top Layer w10: U1.43 2937.44,4038.23 2971.77,4038.23 v1(3005,4005)
  Bottom Layer w10: v1(3005,4005) 3100,3910 3100,3800 3138.88,3761.12 3177.23,3761.12 3178.35,3760 3202.56,3760 P4.18
PE13: P4.19 U1.44 | length 595.6
  Top Layer w10: v1(2860,4045) 2873.11,4058.11 U1.44
  Bottom Layer w10: v1(2860,4045) 2996.3,4045 3122.7,3918.6 3122.7,3864.07 3145.29,3841.48 3199.82,3841.48 P4.19
PE14: P4.20 U1.45 | length 491
  Top Layer w10: v1(2885,4080) 2887.71,4080 2889.91,4077.8 U1.45
  Bottom Layer w10: v1(2885,4080) 2985,4080 3145,3920 3200.04,3920 P4.20
PE15: P4.21 U1.46 | length 360.2
  Top Layer w10: U1.46 2999.81,4097.48 3007.29,4090 v1(3010,4090)
  Bottom Layer w10: v1(3010,4090) 3101.04,3998.96 3199.82,3998.96 P4.21
SPI2_MISO(PC2): U1.17 U2.2 | length 829.4
  Top Layer w10: U1.17 2718.74,3595 2748.74,3565 2790,3565 2860,3495 v1(2860,3375)
  Bottom Layer w10: U2.2 2495.88,3299.4 2519.28,3276 2816,3276 2860,3320 v1(2860,3375)
SPI2_MOSI(PC3): U1.18 U2.5 | length 679.6
  Top Layer w10: v1(2335,3610) 2335,3635 2516,3816 2639,3816 2738.43,3716.57 U1.18
  Bottom Layer w10: v1(2335,3610) 2335.76,3609.24 U2.5
SPI2_SCK(PB10): U1.47 U2.6 | length 808.2
  Top Layer w10: v1(2680,4025) 2715,4060 2820,4060 2877.17,4117.17 U1.47
  Bottom Layer w10: U2.6 2445.88,3640.88 2495,3690 2495,3840 v1(2680,4025)
SWCLK: P1.2 R6.1 U1.76 | length 892.3
  Top Layer w10: P1.2 1816,4474 2098.63,4474 2206.31,4366.31 2206.31,4259.01 2289.1,4176.22 U1.76
  Bottom Layer w10: R6.1 1750,4457.5 P1.2
SWDIO: P1.3 R7.1 U1.72 | length 849.9
  Top Layer w10: P1.3 1898.4,4490 2105.25,4490 2240.25,4355 2385,4355 2462.83,4277.17 U1.72
  Bottom Layer w10: R7.1@1848.4,4455.9 R7.1 1847.5,4539.1 P1.3
TIM3_CH1(PA6): P4.6 U1.31 | length 224.4
  Top Layer w10: U1.31 3160.35,3802.2 P4.6
TIM3_CH2(PA7): P4.7 U1.32 | length 248.1
  Top Layer w10: U1.32 3001.89,3821.89 3060.04,3880.04 P4.7
TIM5_CH3(PA2): P2.14 U1.25 | length 541
  Top Layer w10: U1.25 2876.22,3592.32 3158.7,3309.84 P2.14
TIM5_CH4(PA3): P4.1 U1.26 | length 495.3
  Top Layer w10: U1.26 3061.22,3703.78 3085,3680 3085,3430 3110,3405 3158.66,3405 P4.1
USART1_RX(PA10): P5.19 U1.69 | length 449.2
  Top Layer w10: P5.19 2321.12,4508.56 2321.12,4423.88 2340,4405 2404.75,4405 2521.89,4287.86 U1.69
USART2_RX(PD6): P3.10 U1.87 | length 430.5
  Top Layer w10: P3.10 2154,3734.04 2154,3841.63 2272.06,3959.68 U1.87
USART2_TX(PD5): P3.9 U1.86 | length 373.1
  Top Layer w10: P3.9 2138,3796.78 2138,3848.25 2269.12,3979.37 U1.86
USART3_RX(PD9): P5.6 U1.56 | length 242.2
  Top Layer w10: P5.6 2755,4464.38 2777.8,4441.58 U1.56
USART3_TX(PD8): P5.5 U1.55 | length 247.8
  Top Layer w10: U1.55 2797.48,4433.74 P5.5
USART4_RX(PC11): P3.2 U1.79 | length 326.3
  Top Layer w10: P3.2 2153,4244.44 2280.28,4117.17 U1.79
USART4_TX(PC10): P3.1 U1.78 | length 383.6
  Top Layer w10: P3.1 2116.3,4359.88 2169,4307.18 2169,4251.07 2283.02,4137.05 2342.56,4137.05 U1.78
USART6_RX(PC7): P5.14 U1.64 | length 367.3
  Top Layer w10: U1.64 2620.32,4295.31 v1(2630,4305)
  Bottom Layer w10: v1(2630,4305) 2630,4361.57 2715,4446.57 2715,4508.74 P5.14
USART6_TX(PC6): P5.13 U1.63 | length 735.9
  Top Layer w10: U1.63 2640,4280 2680,4320 v1(2680,4340)
  Bottom Layer w10: P5.13 2209.5,4464.32 2209.5,4435.5 2375,4270 2630,4270 2680,4320 v1(2680,4340)
pads on no net: P2.17 P2.18 P2.19 P2.21 P3.16 P4.12 P4.22 P4.24 P4.25 P4.26 P5.9 P5.10 P5.11 P5.12

## Polygon pours and split planes (outlines as drawn)
GND on GND02 (split plane): 3188.78,4624.61 3197.49,4623.47 3206.06,4621.56 3214.44,4618.92 3222.56,4615.56 3230.35,4611.5 3237.76,4606.78 3244.73,4601.44 3250.73,4595.94 3251.14,4595.43 3251.64,4595.03 3257,4589.18 3262.22,4582.37 3266.83,4575.14 3270.79,4567.54 3274.07,4559.62 3276.64,4551.44 3278.5,4543.07 3279.62,4534.57 3279.97,4526.64 3279.9,4526 3279.9,3200 3279.97,3199.35 3279.61,3191.22 3278.47,3182.51 3276.56,3173.94 3273.92,3165.56 3270.56,3157.44 3266.5,3149.65 3261.78,3142.24 3256.44,3135.27 3250.94,3129.27 3250.43,3128.86 3250.03,3128.36 3244.18,3123 3237.37,3117.78 3230.14,3113.17 3222.54,3109.21 3214.62,3105.93 3206.44,3103.36 3198.07,3101.5 3189.57,3100.38 3183.08,3100.1 1645,3100.1 1644.35,3100.03 1636.22,3100.39 1627.51,3101.53 1618.94,3103.44 1610.56,3106.08 1602.44,3109.44 1594.65,3113.5 1587.24,3118.22 1580.27,3123.56 1574.27,3129.06 1573.86,3129.57 1573.36,3129.97 1568,3135.82 1562.78,3142.63 1558.17,3149.86 1554.21,3157.46 1550.93,3165.38 1548.36,3173.56 1546.5,3181.93 1545.38,3190.43 1545.03,3198.36 1545.1,3198.99 1545.1,4480 1545.1,4525 1545.03,4525.65 1545.39,4533.78 1546.53,4542.49 1548.44,4551.06 1551.08,4559.44 1554.44,4567.56 1558.5,4575.35 1563.22,4582.76 1568.56,4589.73 1574.06,4595.73 1574.57,4596.14 1574.97,4596.64 1580.82,4602 1587.63,4607.22 1594.86,4611.83 1602.46,4615.79 1610.38,4619.07 1618.56,4621.64 1626.93,4623.5 1635.43,4624.62 1641.92,4624.9 3180,4624.9 3180.65,4624.97
3.3V on PO (split plane): 3188.78,4624.61 3197.49,4623.47 3206.06,4621.56 3214.44,4618.92 3222.56,4615.56 3230.35,4611.5 3237.76,4606.78 3244.73,4601.44 3250.73,4595.94 3251.14,4595.43 3251.64,4595.03 3257,4589.18 3262.22,4582.37 3266.83,4575.14 3270.79,4567.54 3274.07,4559.62 3276.64,4551.44 3278.5,4543.07 3279.62,4534.57 3279.97,4526.64 3279.9,4526 3279.9,3200 3279.97,3199.35 3279.61,3191.22 3278.47,3182.51 3276.56,3173.94 3273.92,3165.56 3270.56,3157.44 3266.5,3149.65 3261.78,3142.24 3256.44,3135.27 3250.94,3129.27 3250.43,3128.86 3250.03,3128.36 3244.18,3123 3237.37,3117.78 3230.14,3113.17 3222.54,3109.21 3214.62,3105.93 3206.44,3103.36 3198.07,3101.5 3189.57,3100.38 3183.08,3100.1 1645,3100.1 1644.35,3100.03 1636.22,3100.39 1627.51,3101.53 1618.94,3103.44 1610.56,3106.08 1602.44,3109.44 1594.65,3113.5 1587.24,3118.22 1580.27,3123.56 1574.27,3129.06 1573.86,3129.57 1573.36,3129.97 1568,3135.82 1562.78,3142.63 1558.17,3149.86 1554.21,3157.46 1550.93,3165.38 1548.36,3173.56 1546.5,3181.93 1545.38,3190.43 1545.03,3198.36 1545.1,3198.99 1545.1,4480 1545.1,4525 1545.03,4525.65 1545.39,4533.78 1546.53,4542.49 1548.44,4551.06 1551.08,4559.44 1554.44,4567.56 1558.5,4575.35 1563.22,4582.76 1568.56,4589.73 1574.06,4595.73 1574.57,4596.14 1574.97,4596.64 1580.82,4602 1587.63,4607.22 1594.86,4611.83 1602.46,4615.79 1610.38,4619.07 1618.56,4621.64 1626.93,4623.5 1635.43,4624.62 1641.92,4624.9 3180,4624.9 3180.65,4624.97

## Keep-outs
Keep-Out Layer:
  lines w10: 1640,4645 1655,4645 3180,4645 cw(c3180,4524.29) 3265.36,4609.64 cw(c3181.72,4526.01) 3300,4526.01 ; 1643.99,4645 ccw(c1643.99,4526.72) 1560.36,4610.36 ccw(c1645.71,4525) 1525,4525 1525,4480 1525,3198.99 ccw(c1643.28,3198.99) 1559.64,3115.36 ccw(c1645,3200.71) 1645,3080 3185,3080 ; 3181.01,3080 ccw(c3181.01,3198.28) 3264.64,3114.64 ccw(c3179.29,3200) 3300,3200 ; 3300,3195 3300,4526 ; 3300,4526 ccw(c3300,4526) 3300,4526

## Other copper
Bottom Layer:
  rectangle net 3.3V: 1655,4100 1805,4140
  rectangle net GND: 2670,3705 2865,3750
  rectangle net GND: 2740,4065 2865,4105
  rectangle net GND: 2215,3335 2265,3545

## Silkscreen, mask and mechanical layers (free items; w line width, h text height)
Top Overlay:
  text "G" at 1625,4385 h40
  text "CLK" at 1690,4385 h40
  text "SW" at 1820,4385 h40
  text "+" at 1930,4383.34 h40
  text "0" at 1885,4295 h40
  text "1" at 1900,3995 h40
  text "1" at 1655,3915 h40
  text "2" at 1696.11,3915 h40
  text "3" at 1750.56,3915 h40
  text "4" at 1805,3915 h40